# Altium PCB nrf52_Radar.PcbDoc
Units mm, origin at the board's own origin, x right, y up, seen from the top; angles counter-clockwise.
Board outline 152.4 x 101.6 mm, 2 copper layers (Top Layer, Bottom Layer); 14 components, 35 nets, 98 pads, 22 vias.
Unrouted connection lines stored in the file: 26.
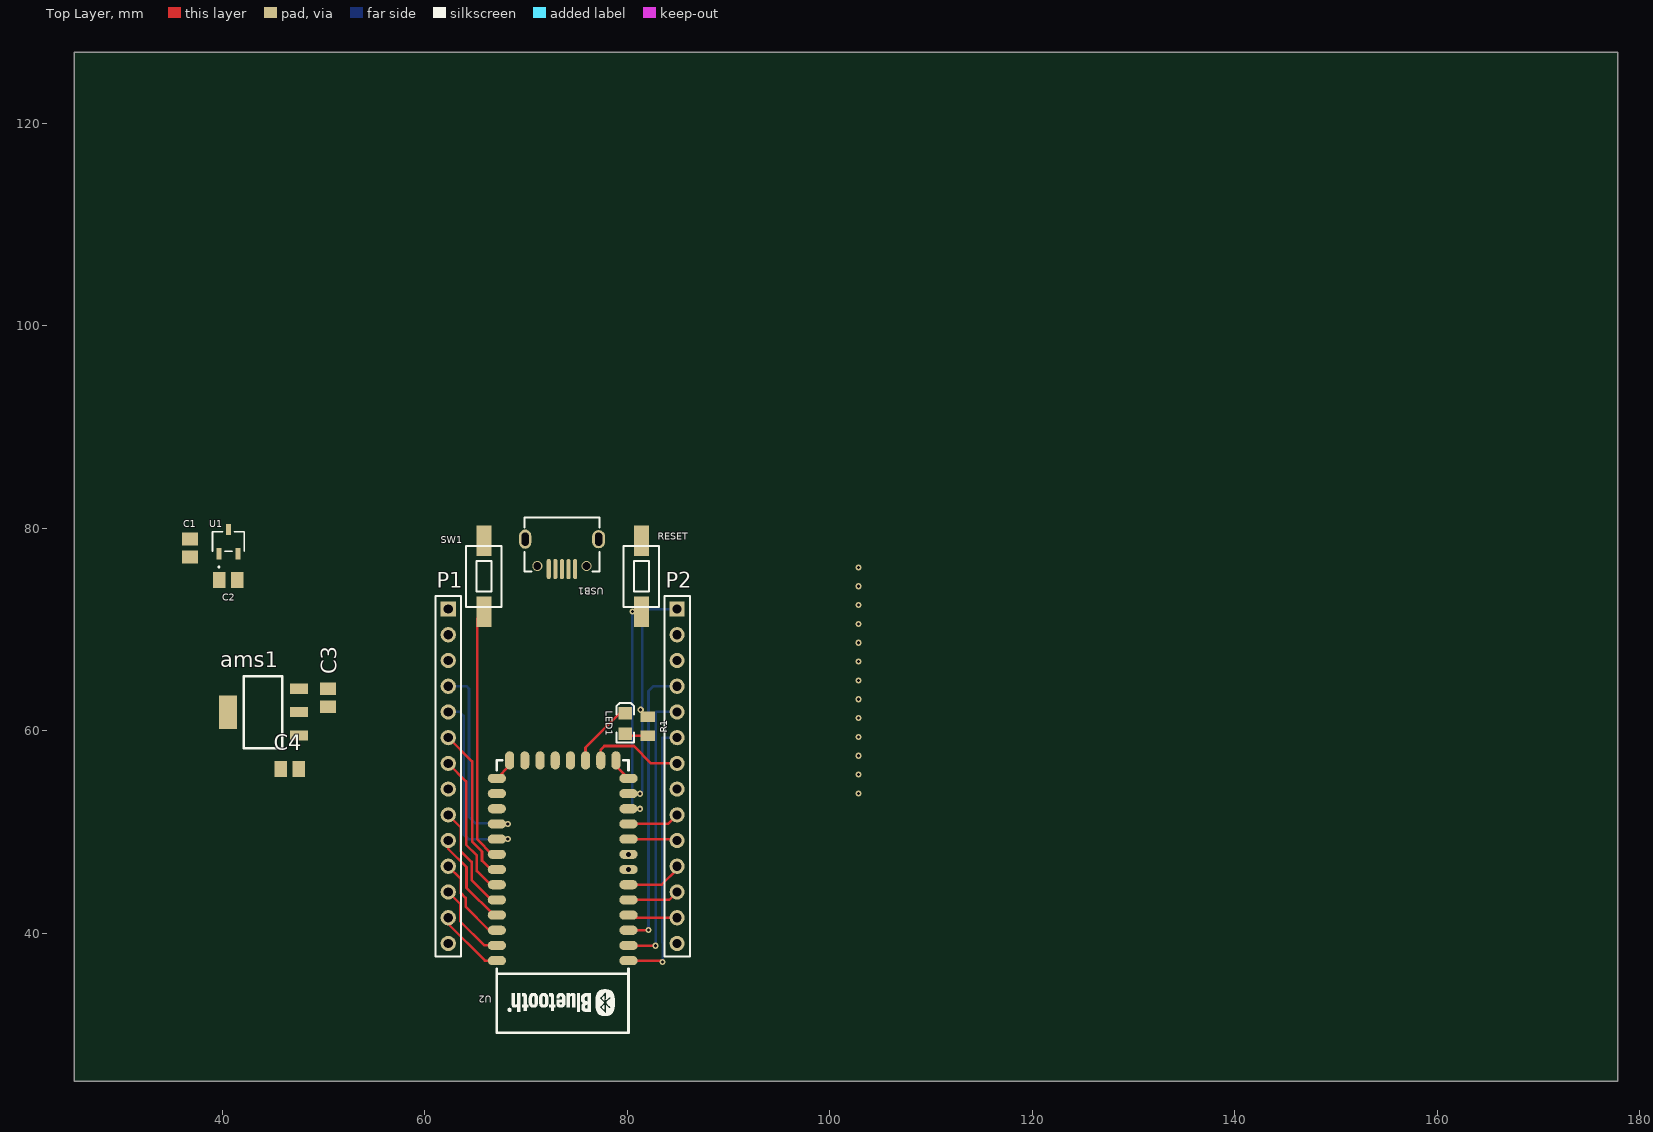
[diagram p0: Top Layer view]
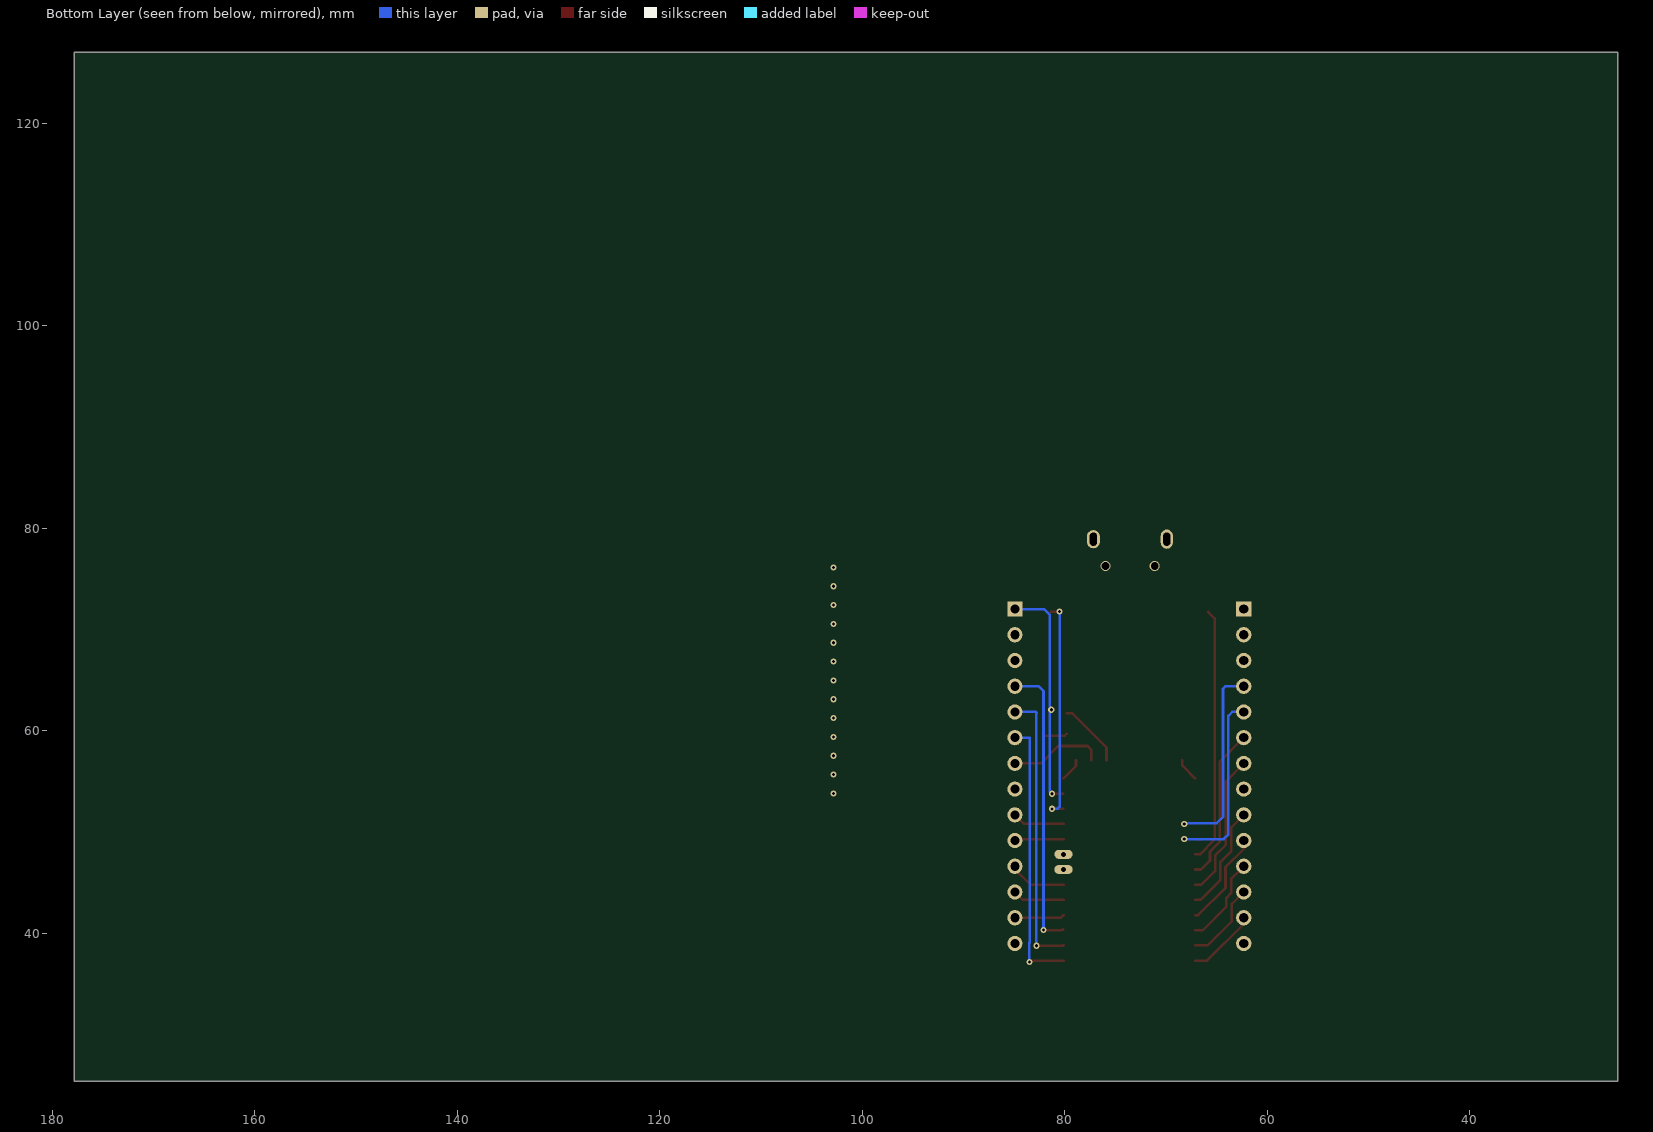
[diagram p1: Bottom Layer view, seen from below]

## Layer stack, top to bottom
Top Solder: solder mask 0.0102, Solder Resist, Dk 3.5
Top Layer: signal copper 0.0356
Dielectric 1: dielectric 0.32, FR-4, Dk 4.8
Bottom Layer: signal copper 0.0356
Bottom Solder: solder mask 0.0102, Solder Resist, Dk 3.5

## Board outline
25.4,25.4 177.8,25.4 177.8,127 25.4,127

## Design rules (kind name [scope] priority, off if disabled: settings)
Clearance Clearance_1 [(InNet('GND') AND InPolygon)] p1: gap=0.254
Clearance [All] p2: gap=0.127
PolygonConnect [All] p1: connectstyle=Relief reliefconductorwidth=0.254 reliefentries=4 polygonreliefangle="90 Angle" airgapwidth=0.254
RoutingVias [All] p1: holewidth=0.711 width=1.27 viastyle="Through Hole" minholewidth=0.711 minwidth=1.27 maxholewidth=0.711 maxwidth=1.27
SolderMaskExpansion [All] p1: expansion=0.102
Width [All] p1: maxlimit=0.254 minlimit=0.254 preferedwidth=0.254
30 further rules are at their usual default settings.

## Components (designator, comment, footprint, x,y, rotation, side; value= is the part's Value field where it differs from the comment)
ams1 "AMS1117" SOT-223 47.575,59.55 r270 top
C1 "Cap Semi" C0805 36.811,78.054 r90 top
C2 "Cap Semi" C0805 40.621,74.879 r0 top
C3 "Cap Semi" C0805 50.45,63.25 r90 top
C4 "Cap Semi" C0805 46.675,56.225 r180 top
LED1 "LED1" "0805 2.0X1.25X1.1" 79.8,60.725 r90 top
P1 "Header 14" HDR1X14 62.325,72.025 r270 top
P2 "Header 14" HDR1X14 84.925,72.025 r270 top
R1 "Resistors SMD" R0805-M 82.025,60.45 r90 top
RESET "SW-PB" SWITCH_SMD_6x3.5 81.4,75.25 r90 top
SW1 "SW-PB" SWITCH_SMD_6x3.5 65.85,75.25 r90 top
U1 "XC6206P121MR" SOT-23 40.621,78.689 r0 top
U2 "nRF52832" BlueTooth_34_SMD 73.625,44.275 r180 top
USB1 "USB-MICRO" USB-MICRO 73.55,78.925 r180 top

## Footprints (in the part's own frame and the unit in brackets; to place one, negate y for a bottom-side part, rotate by r counter-clockwise, add the part's x,y. Pads: shape width x height; smd on the part's side, far side on the other; paste and mask are expansions set on the pad)
"0805 2.0X1.25X1.1" [mm] "Chip LED, Body 2.0x1.25mm"
  rect 1.25x1.35 smd: 1(-1,0) 2(1,0)
  Top Layer pour cut-out: -0.25,0.875 0.25,0.875 0.25,-0.875 -0.25,-0.875
  silkscreen extent -1.9,-0.87 2.02,0.87, body extent -1.01,-0.63 1.01,0.62, height 1.1
BlueTooth_34_SMD [mm]
  oval 1.8x0.9 smd: 1(-6.5,6.968) 2(-6.5,5.468) 3(-6.5,3.968) 4(-6.5,2.468) 5(-6.5,0.968) 6(-6.5,-0.532) 9(-6.5,-5.032) 10(-6.5,-6.532) 11(-6.5,-8.032) 12(-6.5,-9.532) 13(-6.5,-11.032) 22(6.5,-11.032) 23(6.5,-9.532) 24(6.5,-8.032) 25(6.5,-6.532) 26(6.5,-5.032) 27(6.5,-3.532) 28(6.5,-2.032) 29(6.5,-0.532) 30(6.5,0.968) 31(6.5,2.468) 32(6.5,3.968) 33(6.5,5.468) 34(6.5,6.968)
  oval 1.8x0.9 hole 0.5: 7(-6.5,-2.032) 8(-6.5,-3.532)
  oval 0.9x1.8 smd: 14(-5.262,-12.81) 15(-3.762,-12.81) 16(-2.262,-12.81) 17(-0.762,-12.81) 18(0.738,-12.81) 19(2.238,-12.81) 20(3.738,-12.81) 21(5.238,-12.81)
  silkscreen extent -6.5,-12.81 6.5,14.07
C0805 [mm] "Chip Capacitor, EIA 0805, IPC-7351 Level B Medium Density"
  round 0.254 on Mech15: 0(0,0)
  rect 1.24x1.56 smd: 1(-0.89,0) 2(0.89,0)
  Top Layer pour cut-out: -0.2,0.775 0.2,0.775 0.2,-0.775 -0.2,-0.775
  body extent -1,-0.62 1,0.63, height 0.58
HDR1X14 [mm] "Connector; Header; 14 Position"
  rect 1.5x1.5 hole 0.9: 1(0,0)
  round 1.5 hole 0.9: 2(2.54,0) 3(5.08,0) 4(7.62,0) 5(10.16,0) 6(12.7,0) 7(15.24,0) 8(17.78,0) 9(20.32,0) 10(22.86,0) 11(25.4,0) 12(27.94,0) 13(30.48,0) 14(33.02,0)
  silkscreen extent -1.27,-1.27 34.29,1.27
R0805-M [mm] "Chip Resistor, 2-Leads, Body 2.10x1.35mm, IPC Medium Density"
  rect 1.05x1.45 smd: 1(-0.925,0) 2(0.925,0)
  Top Layer pour cut-out: -0.381,0.925 0.381,0.925 0.381,-0.925 -0.381,-0.925
  body extent -1,-0.62 1,0.63, height 0.44
SOT-23 [mil]
  rect 19x44 smd paste+0 mask+0: 1(-37.4,-47) 2(37.4,-47) 3(0,47)
  silkscreen extent -62,-102 62,38, body extent 0,0 10,10, height 10
SOT-223 [mm]
  rect 3.3x1.8 smd: 0(-2.3,-7)
  rect 1x1.8 smd: 1(0,0) 2(-2.3,0) 3(-4.6,0)
  silkscreen extent -5.85,-5.45 1.25,-1.64
SWITCH_SMD_6x3.5 [mm]
  rect 3x1.5 smd: 1(-3.5,0) 2(3.5,0)
  silkscreen extent -3,-1.75 3,1.75
USB-MICRO [mm] "USB方孔"
  oval 1.3x1.8 hole 0.7 slot 1.3 at 90 deg: 0(-3.625,0)
  round 1 hole 0.75: 0(-2.425,2.65) 0(2.425,2.65)
  oval 1.2x1.9 hole 0.7 slot 1.3 at 90 deg: 0(3.625,0)
  oval 0.4x2 smd: 1(-1.3,2.95) 2(-0.65,2.95) 3(0,2.95) 4(0.65,2.95) 5(1.3,2.95)
  silkscreen extent -3.7,-2.15 3.7,3.21

## Part data
C1 C2 C3 C4: "Capacitor (Semiconductor SIM Model)"
LED1: library part LED, "Typical INFRARED GaAs LED"
P1 P2: "Header, 14-Pin"
R1: "Resistor"
RESET SW1: "按鈕開關"
U1: "Imported"

## Via types
v1: diameter 0.61, hole 0.305, Top Layer to Bottom Layer, tented both sides, 22 vias

## Nets (pads, with @x,y where several pads share a name; then routed paths per layer and width w, separated by ;. In a path a pad name is that pad's centre, name@x,y a point inside that pad or via, vN(x,y) a via of type N, cw(c..) or ccw(c..) an arc to the next point about the centre after c; other vN are vias at no path point)
3V3: ams1.2 C2.2 C4.2 P2.1 R1.2 U1.2 U2.12 | length 22.5
  Top Layer w0.254: U2.12@80.148,53.784 v1(81.25,53.784)
  Bottom Layer w0.254: v1(81.25,53.784) 81.475,54.009 81.475,71.45 82.05,72.025 P2.1
  other v1: 81.325,62.084
BGT24_EN: P2.5 U2.2 | length 27.9
  Top Layer w0.254: U2.2 80.157,38.775 v1(82.8,38.775)
  Bottom Layer w0.254: v1(82.8,38.775) 82.8,61.75 82.775,61.775 82.865,61.865 P2.5
D+: USB1.3
D-: USB1.2
EN: P2.4 U2.3 | length 28.6
  Top Layer w0.254: U2.3@80.155,40.337 80.218,40.4 80.293,40.325 v1(82.1,40.325)
  Bottom Layer w0.254: v1(82.1,40.325) 82.1,63.925 82.58,64.405 P2.4
GND: ams1.1 C1.1 C2.1 C3.1 C4.1 P1.1 P1.8 P1.14 P2.14 RESET.2 SW1.2 U1.1 U2.13 U2.14 U2.21 U2.22 USB1.0 USB1.5 | length 4.6
  Top Layer w0.254: U2.22 68.387,56.569 U2.21 ; U2.14 78.887,56.545 U2.13
I_CW: P2.10 U2.9 | length 4.9
  Top Layer w0.254: U2.9 84.783,49.307 P2.10
I_HIGHGAIN: P2.13 U2.4 | length 4.9
  Top Layer w0.254: U2.4 80.387,41.545 P2.13
MUXOUT: P1.4 U2.25 | length 18.9
  Bottom Layer w0.254: P1.4 64.12,64.405 64.375,64.15 64.375,51.5 65,50.875 v1@68.2,50.875
  other v1: 68.2,50.807
NetLED1_1: LED1.1 R1.1 | length 2.3
  Top Layer w0.254: LED1.1 80,59.525 R1.1
P0.04: LED1.2 U2.16 | length 6.6
  Top Layer w0.254: U2.16 75.875,57.097 75.875,58.35 79.25,61.725 LED1.2
P0.05: U2.17
P0.06: U2.18
P0.07: U2.19
P0.08: U2.20
P0.09: U2.23
P0.10: U2.24
P0.13: SW1.1 U2.27 | length 25.3
  Top Layer w0.254: SW1.1 65.2,71.1 65.2,49.275 66.668,47.807 U2.27
P0.14: P1.6 U2.28 | length 15.3
  Top Layer w0.254: P1.6 64.675,56.975 64.675,49.066 65.658,48.083 65.658,47.192 66.543,46.307 U2.28
P0.15: P1.7 U2.29 | length 14.3
  Top Layer w0.254: P1.7 64.1,55.01 64.1,48.75 65.15,47.7 65.15,46.158 66.501,44.807 U2.29
P0.16: P1.9 U2.30 | length 11.2
  Top Layer w0.254: P1.9@62.325,51.175 P1.9 63.55,50.48 63.55,48.15 64.642,47.058 64.642,45.258 66.593,43.307 U2.30
P0.17: P1.10 U2.31 | length 9.5
  Top Layer w0.254: P1.10 62.325,48.35 64.125,46.55 64.125,44.502 66.82,41.807 U2.31
P0.18: P1.11 U2.32 | length 8.7
  Top Layer w0.254: P1.11 63.575,45.375 63.575,43.975 64.042,43.508 64.042,42.633 66.368,40.307 U2.32
P0.19: P1.12 U2.33 | length 8
  Top Layer w0.254: P1.12 63.51,42.9 63.51,41.19 65.893,38.807 U2.33
P0.20: P1.13 U2.34 | length 6.9
  Top Layer w0.254: P1.13 62.325,40.925 65.943,37.307 U2.34
P0.21: RESET.1 U2.11 | length 21.9
  Top Layer w0.254: U2.11@80.132,52.3 v1(81.275,52.3) ; v1(80.525,71.775) 80.55,71.75 RESET.1
  Bottom Layer w0.254: v1@80.5,71.574 80.5,52.525 80.725,52.3 v1(81.275,52.3)
Q_CW: P2.11 U2.6 | length 5.7
  Top Layer w0.254: U2.6 83.407,44.807 84.925,46.325 P2.11
Q_HIGHGAIN: P2.12 U2.5 | length 5.1
  Top Layer w0.254: U2.5 84.147,43.307 P2.12
SPI_CLK: P2.9 U2.10 | length 5.2
  Top Layer w0.254: U2.10 84.027,50.807 P2.9
SPI_CS: P2.6 U2.1 | length 27
  Top Layer w0.254: U2.1 83.343,37.307 v1(83.475,37.175)
  Bottom Layer w0.254: v1(83.475,37.175) 83.486,37.186 83.486,39.059 83.475,39.07 83.475,59.325 P2.6
SPI_MOSI: P2.7 U2.15 | length 9.5
  Top Layer w0.254: U2.15 77.387,58.137 77.75,58.5 80.65,58.5 82.365,56.785 P2.7
SW_DCLK: U2.8
SW_DIO: U2.7
TXDATA: P1.5 U2.26 | length 18.6
  Top Layer w0.254: U2.26@66.476,49.307 U2.26
  Bottom Layer w0.254: P1.5 63.46,61.865 63.85,61.475 63.85,49.775 64.318,49.307 v1(68.2,49.307)
V_USB: ams1.3 C1.2 C3.2 U1.3 USB1.1
pads on no net: ams1.0 C1.0 C2.0 C3.0 C4.0 P1.2 P1.3 P2.2 P2.3 P2.8 USB1.4
copper on no net:
  other v1: 102.85,53.815 102.85,55.675 102.85,57.535 102.85,59.396 102.85,61.256 102.85,63.116 102.85,64.976 102.85,66.837 102.85,68.697 102.85,70.557 102.85,72.418 102.85,74.278 102.85,76.138

## Other copper
Top Layer:
  pour cut-out: 81.032,30.357 81.032,35.79 81.067,35.825 66.081,35.825 66.081,30.364